# Altium PCB WeatherChannel.PcbDoc (part 2 of 2)
Units mil, origin at the board's own origin, x right, y up, seen from the top; angles counter-clockwise.
Board outline 4050 x 7300 mil, 2 copper layers (Top Layer, Bottom Layer); 129 components, 144 nets, 770 pads, 170 vias.
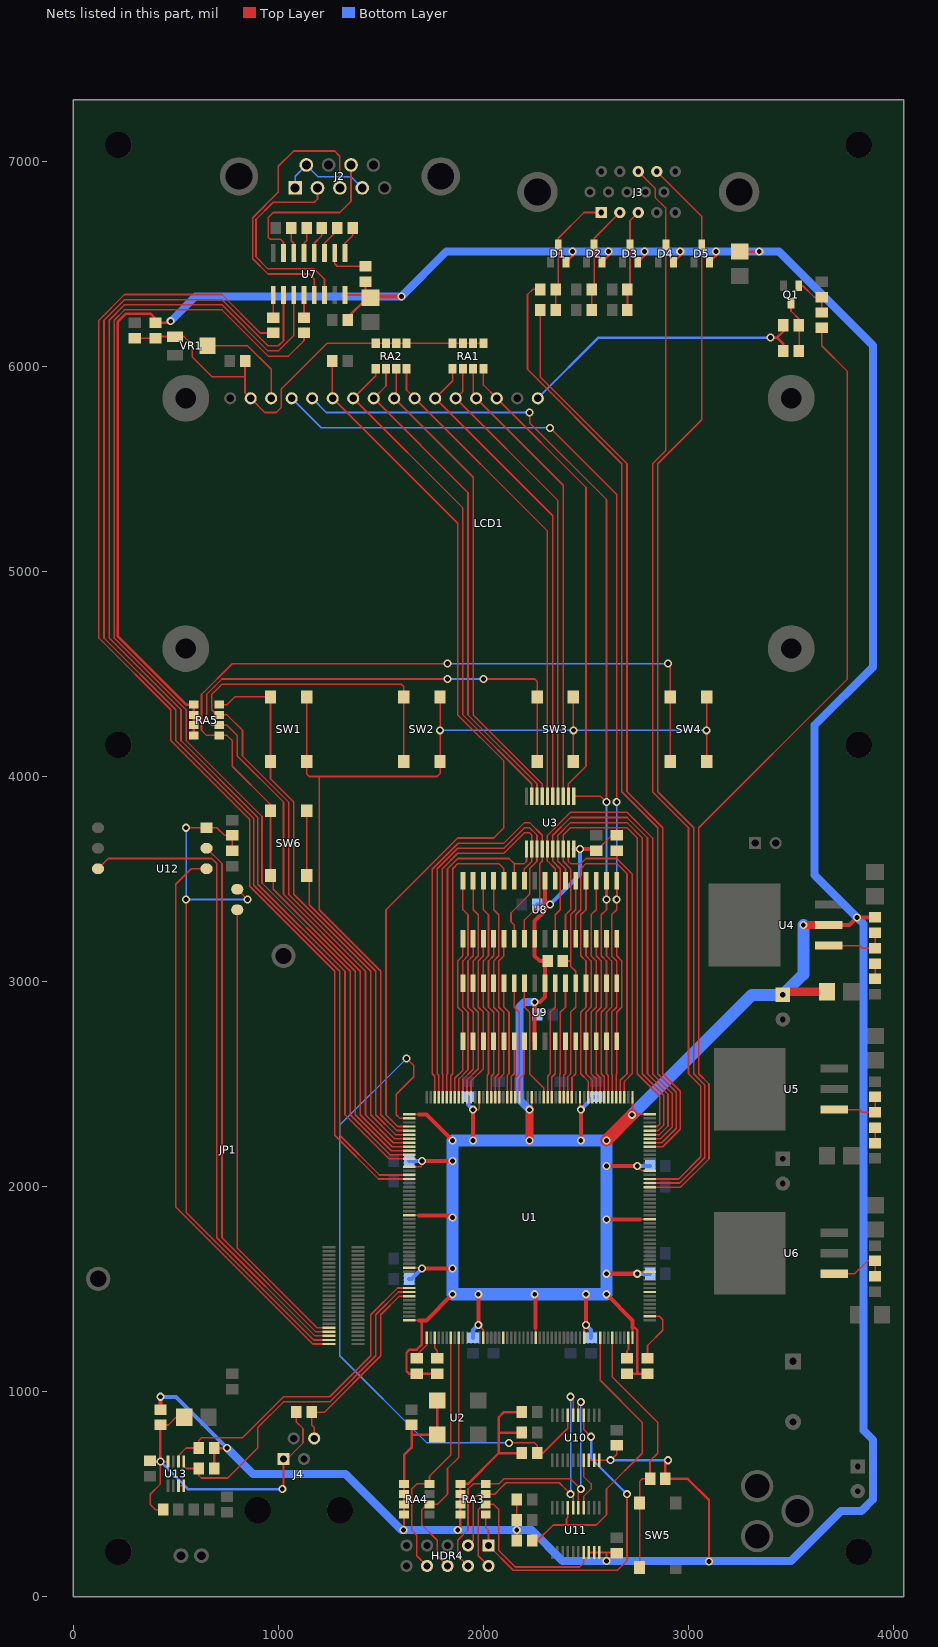
[diagram p2: the nets of this part, all layers, seen from the top]

## Via types
v1: diameter 39.37, hole 23.62, Top Layer to Bottom Layer, 170 vias

## Nets (pads, with @x,y where several pads share a name; then routed paths per layer and width w, separated by ;. In a path a pad name is that pad's centre, name@x,y a point inside that pad or via, vN(x,y) a via of type N, cw(c..) or ccw(c..) an arc to the next point about the centre after c; other vN are vias at no path point) (continued)
JTAG_NEXUS_TDO: HDR4.6 RA4.2 U1.165 | length 1294.2
  Top Layer w7.87: HDR4.6@1825,175 HDR4.6@1825,150 1775,200 1775,275 1700,350 1700,425 1725,450 RA4.2@1737,450 1775,450 1825,500 1825,625 1880.51,680.51 U1.165@1880.51,1263.39
JTAG_NEXUS_TMS: HDR4.8 RA4.4 U1.163 | length 1259.9
  Top Layer w7.87: HDR4.8@1725,150 1675,200 1675,300 1650,325 1650,525 1675,550 RA4.4@1737,550 1737,587 1841.14,691.14 U1.163@1841.14,1263.39
KP_COL0: RA5.4 SW1.3 SW1.4 U1.111 | length 2742.1
  Top Layer w7.87: RA5.4@712,4350 750,4350 787.87,4387.87 SW1.3@961.81,4387.87 SW1.4@961.81,4072.52 961.81,3988.19 1075,3875 1075,3425 1450,3050 1450,2375 1450,2350 1566.14,2233.86 U1.111@1638.39,2233.86
KP_COL1: RA5.3 SW2.3 SW2.4 U1.112 | length 3987.7
  Top Layer w7.87: SW2.4@1611.81,4072.52 SW2.3@1611.81,4387.87 1611.81,4438.19 1600,4450 725,4450 675,4400 675,4325 700,4300 RA5.3@712,4300 750,4300 825,4225 825,4100 1050,3875 1050,3425 1425,3050 1425,2375 1425,2350 1560.83,2214.17 U1.112@1638.39,2214.17
KP_COL2: RA5.2 SW3.3 SW3.4 U1.113 | length 4745.8
  Top Layer w7.87: U1.113@1638.39,2194.49 1555.51,2194.49 1400,2350 1400,2375 1400,3050 1025,3425 1025,3875 800,4100 800,4200 750,4250 RA5.2@712,4250 675,4250 650,4275 650,4400 725,4475 v1(1825,4475) ; v1(2000,4475) 2250,4475 2261.81,4463.19 SW3.3@2261.81,4387.87 SW3.4@2261.81,4072.52
  Bottom Layer w7.87: v1(1825,4475) v1(2000,4475)
KP_COL3: RA5.1 SW4.3 SW4.4 SW6.3 SW6.4 U1.114 | length 5574.7
  Top Layer w7.87: SW6.4@961.81,3517.52 975,3504.33 975,3450 1375,3050 1375,2375 1375,2350 1550.2,2174.8 U1.114@1638.39,2174.8 ; SW6.4@961.81,3522.52 SW6.3@961.81,3837.87 ; SW6.3@961.81,3832.87 961.81,3863.19 775,4050 775,4175 750,4200 RA5.1@712,4200 650,4200 625,4225 625,4400 775,4550 v1(1825,4550) ; v1(2900,4550) 2911.81,4538.19 SW4.3@2911.81,4387.87 SW4.4@2911.81,4072.52
  Bottom Layer w7.87: v1(1825,4550) v1(2900,4550)
KP_ROW0: SW1.1 SW1.2 SW2.1 SW2.2 SW3.1 SW3.2 SW4.1 SW4.2 U1.109 | length 5286.3
  Top Layer w7.87: SW1.1@1138.58,4387.87 SW1.2@1138.58,4072.52 1138.58,4011.42 1150,4000 1775,4000 1788.58,4013.58 SW2.2@1788.58,4072.52 SW2.1@1788.58,4387.87 ; 1200,4000 1200,3350 1500,3050 1500,2375 1500,2350 1576.77,2273.23 U1.109@1638.39,2273.23 ; SW3.2@2438.58,4072.52 SW3.1@2438.58,4387.87 ; SW4.2@3088.58,4072.52 SW4.1@3088.58,4387.87
  Bottom Layer w7.87: v1(1788.58,4225) v1(2438.58,4225) v1(3088.58,4225)
KP_ROW1: U1.8
KP_ROW2: U1.176
KP_ROW3: SW6.1 SW6.2 U1.110 | length 1825.6
  Top Layer w7.87: SW6.2@1138.58,3517.52 1150,3506.1 1150,3375 1475,3050 1475,2375 1475,2350 1571.46,2253.54 U1.110@1638.39,2253.54 ; SW6.2@1138.58,3522.52 SW6.1@1138.58,3837.87
LCD_BCKL: R9.1 U1.34 | length 4770.7
  Top Layer w7.87: U1.34@2811.61,1997.64 2962.64,1997.64 3100,2135 3100,2500 3050,2550 3050,3750 3775,4475 3775,5975 3650,6100 R9.1@3650,6187.6
LCD_D0: LCD1.7 RA2.1 U3.9 | length 2490.2
  Top Layer w7.87: RA2.1@1475,5988 1475,5954 LCD1.7@1365,5844 1900,5309 1900,4300 2235.43,3964.57 U3.9@2235.43,3903.94
LCD_D1: LCD1.8 RA2.2 U3.8 | length 2438.6
  Top Layer w7.87: RA2.2@1525,5988 1525,5904 LCD1.8@1465,5844 1925,5384 1925,4300 2261.02,3963.98 U3.8@2261.02,3903.94
LCD_D2: LCD1.9 RA2.3 U3.7 | length 2387.3
  Top Layer w7.87: LCD1.9@1550,5850 1575,5875 RA2.3@1575,5988 ; LCD1.9@1565,5844 1950,5459 1950,4300 2286.61,3963.39 U3.7@2286.61,3903.94
LCD_D3: LCD1.10 RA2.4 U3.6 | length 2368.7
  Top Layer w7.87: RA2.4@1625,5988 1625,5884 LCD1.10@1665,5844 2312.2,5196.8 U3.6@2312.2,3903.94
LCD_D4: LCD1.11 RA1.1 U3.5 | length 2356.5
  Top Layer w7.87: RA1.1@1850,5988 1850,5929 LCD1.11@1765,5844 2337.8,5271.2 U3.5@2337.8,3903.94
LCD_D5: LCD1.12 RA1.2 U3.4 | length 2305
  Top Layer w7.87: RA1.2@1900,5988 1900,5879 LCD1.12@1865,5844 2363.39,5345.61 U3.4@2363.39,3903.94
LCD_D6: LCD1.13 RA1.3 U3.3 | length 2265.9
  Top Layer w7.87: RA1.3@1950,5988 1950,5859 LCD1.13@1965,5844 2388.98,5420.02 U3.3@2388.98,3903.94
LCD_D7: LCD1.14 RA1.4 U3.2 | length 2326.6
  Top Layer w7.87: RA1.4@2000,5988 2000,5909 LCD1.14@2065,5844 2500,5409 2500,4050 2414.57,3964.57 U3.2@2414.57,3903.94
LCD_E: LCD1.6 R5.1 U1.108 | length 4496.2
  Top Layer w7.87: LCD1.6@1262.6,5846.4 R5.1@1262.6,6025 ; LCD1.6@1265,5844 1875,5234 1875,4300 2100,4075 2100,3750 2050,3700 1875,3700 1725,3550 1525,3350 1525,2350 1582.09,2292.91 U1.108@1638.39,2292.91
LCD_EDATA: R6.1 U1.55 U3.19 | length 1558.3
  Top Layer w7.87: U3.19@2414.57,3646.06 2414.57,3585.43 2425,3575 2475,3575 2500,3600 2650,3600 ; R6.1@2650,3637.6 2650,3600 ; U1.55@2687.6,2436.61 2687.6,2512.6 2725,2550 2725,3525 2650,3600
NetC14_1: C14.1 U7.1 | length 138.1
  Top Layer w7.87: U7.1@1325,6552.36 1325,6600 1362.4,6637.4 C14.1@1362.4,6675
NetC14_2: C14.2 U7.3 | length 148.6
  Top Layer w7.87: U7.3@1225,6552.36 1225,6600 1287.6,6662.6 C14.2@1287.6,6675
NetC15_2: C15.2 U7.2 | length 207.6
  Top Layer w7.87: U7.2@1275,6552.36 1275,6500 1287.6,6487.4 C15.2@1425,6487.4
NetC16_1: C16.1 U7.4 | length 138.1
  Top Layer w7.87: U7.4@1175,6552.36 1175,6600 1212.4,6637.4 C16.1@1212.4,6675
NetC16_2: C16.2 U7.5 | length 127.9
  Top Layer w7.87: U7.5@1125,6552.36 1125,6600 1137.6,6612.6 C16.2@1137.6,6675
NetC17_1: C17.1 U7.6 | length 127.9
  Top Layer w7.87: C17.1@1062.4,6675 1062.4,6612.6 1075,6600 U7.6@1075,6552.36
NetC41_1: C41.1 C42.1 JP1.2 U12.1 U12.7 | length 3516.3
  Top Layer w7.87: v1(550,3400) 550,1875 1173.03,1251.97 JP1.2@1246.46,1251.97 ; v1(550,3750) U12.1@650,3750 700,3750 737.4,3712.6 C42.1@775,3712.6 C41.1@775,3637.4 ; U12.7@799.61,3450 849.61,3400 v1(850,3400)
  Bottom Layer w7.87: v1(550,3750) v1(550,3400) v1(850,3400)
NetD1_3: D1.3 J3.1 R31.2 R34.2 | length 617
  Top Layer w7.87: R31.2@2352.4,6275 R34.2@2352.4,6375 2365,6387.6 D1.3@2365,6593.31 2365,6625 2490,6750 J3.1@2575,6750
NetD2_3: D2.3 J3.2 R32.2 R35.2 | length 532.1
  Top Layer w7.87: R32.2@2527.4,6275 R35.2@2527.4,6375 2540,6387.6 D2.3@2540,6593.31 2540,6624.84 J3.2@2665.16,6750
NetD3_3: D3.3 J3.3 R33.2 R36.2 | length 496.9
  Top Layer w7.87: R33.2@2702.4,6275 R36.2@2702.4,6375 2715,6387.6 D3.3@2715,6593.31 2715,6709.68 J3.3@2755.32,6750
NetJ2_1: J2.1 J2.4 J2.6 | length 457.5
  Bottom Layer w7.87: J2.1@1081.89,6870.08 1081.89,6927.36 J2.6@1136.42,6981.89 1193.31,6925 1354.13,6925 J2.4@1409.05,6870.08 ; J2.1@1104.92,6845.08 J2.1@1109.05,6845.08
NetJP1_1: JP1.1 U12.3 | length 2779.1
  Top Layer w7.87: U12.3@650,3550 575,3550 500,3475 500,1900 1167.72,1232.28 JP1.1@1246.46,1232.28
NetJP1_3: JP1.3 U12.6 | length 3180.2
  Top Layer w7.87: U12.6@120.47,3550 170.47,3600 675,3600 700,3575 700,1750 1178.35,1271.65 JP1.3@1246.46,1271.65
NetJP1_4: JP1.4 U12.2 | length 2642.5
  Top Layer w7.87: U12.2@650,3650 725,3575 725,1750 1183.66,1291.34 JP1.4@1246.46,1291.34
NetJP1_5: JP1.5 U12.8 | length 2257.7
  Top Layer w7.87: U12.8@799.61,3350 799.61,1700.39 1188.98,1311.02 JP1.5@1246.46,1311.02
NetLCD1_3: LCD1.3 VR1.W | length 499.9
  Top Layer w7.87: VR1.W@653.74,6100 850,6100 965,5985 LCD1.3@965,5844
NetLCD1_16: LCD1.16 R7.1 R8.1 | length 1454
  Top Layer w11.81: v1@3410,6150 v1(3400,6140) 3431.5,6140 ; R8.1@3462.6,6075 3462.6,6108.9 3431.5,6140 ; R7.1@3462.6,6200 3462.6,6171.1 3431.5,6140
  Bottom Layer w11.81: LCD1.16@2265,5844 2561,6140 v1(3400,6140)
NetQ1_1: Q1.1 R9.2 R10.2 | length 210.9
  Top Layer w7.87: Q1.1@3537.4,6393.31 3556.69,6393.31 3612.4,6337.6 R10.2@3650,6337.6 R9.2@3650,6262.4
NetQ1_3: Q1.3 R7.2 R8.2 | length 248.3
  Top Layer w7.87: Q1.3@3500,6306.69 3500,6269.29 3540,6229.29 3540,6197.4 R8.2@3540,6075
NetR13_2: R13.2 R16.1 U4.1 | length 305.4
  Top Layer w7.87: U4.1@3685,3175 3835,3175 3847.6,3162.4 R16.1@3910,3162.4 R13.2@3910,3237.6
NetR14_2: R14.2 R18.1 U5.1 | length 280.4
  Top Layer w7.87: U5.1@3710,2375 3835,2375 3847.6,2362.4 R18.1@3910,2362.4 R14.2@3910,2437.6
NetR15_2: R15.2 R20.1 U6.1 | length 301.1
  Top Layer w7.87: U6.1@3710,1575 3810,1575 3872.6,1637.6 R15.2@3910,1637.6 R20.1@3910,1562.4
NetR16_2: R16.2 R17.1 | length 75.2
  Top Layer w7.87: R17.1@3910,3012.4 R16.2@3910,3087.6
NetR18_2: R18.2 R19.1 | length 75.2
  Top Layer w7.87: R19.1@3910,2212.4 R18.2@3910,2287.6
NetR21_2: R21.2 U7.12 | length 110.2
  Top Layer w7.87: R21.2@1125,6237.4 U7.12@1125,6347.64
NetR22_2: R22.2 U7.9 | length 110.2
  Top Layer w7.87: R22.2@975,6237.4 U7.9@975,6347.64
NetU10_17: U10.17 U11.4 | length 261.8
  Top Layer w7.87: U11.4@2488.39,434.25 2488.39,488.39 2525,525 2525,550 2488.39,586.61 U10.17@2488.39,665.75
NetU13_3: U13.3 U13.4 | length 25.6
  Top Layer w7.87: U13.3@512.8,540.95 U13.4@538.39,540.95
PROGRAM: R26.2 U1.106 U10.7 | length 3423.5
  Top Layer w7.87: v1(1625,2625) 1660,2590 1660,2535 1575,2450 1575,2350 1592.72,2332.28 U1.106@1638.39,2332.28 ; v1(2125,750) 2250,750 2262.4,737.6 R26.2@2262.4,700 2290,700 2411.61,821.61 U10.7@2411.61,884.25
  Bottom Layer w7.87: v1(1625,2625) 1300,2300 1300,1175 1725,750 v1(2125,750)
PROGRAM_PR: R29.2 U1.200 U11.7 | length 1522.4
  Top Layer w7.87: R29.2@2237.4,275 2265,275 2340,350 2385,350 2550,350 2600,400 2600,525 2775,700 2775,850 2569.49,1055.51 U1.200@2569.49,1263.39 ; 2405,350 2405,380 2411.61,386.61 U11.7@2411.61,434.25
RAM0_DATA0: U1.99 U3.11 U8.11 | length 1679.3
  Top Layer w7.87: U1.99@1821.46,2436.61 1821.46,2546.46 1825,2550 1825,3550 1875,3600 2125,3600 2150,3575 ; U8.11@2150,3491.73 2150,3575 ; U3.11@2209.84,3646.06 2209.84,3584.84 2200,3575 2150,3575
RAM0_DATA1: U1.100 U3.12 U8.10 | length 1863.9
  Top Layer w7.87: U1.100@1801.77,2436.61 1801.77,2548.23 1800,2550 1800,3550 1875,3625 2100,3625 2200,3725 2225,3725 2235.43,3714.57 2235.43,3585.43 2200,3550 U8.10@2200,3491.73
RAM0_DATA2: U1.101 U3.13 U8.22 | length 2264.9
  Top Layer w7.87: U1.101@1782.09,2436.61 1782.09,2542.91 1775,2550 1775,3550 1875,3650 2100,3650 2200,3750 2225,3750 2261.02,3713.98 2261.02,3586.02 2225,3550 2225,3425 2134.25,3334.25 2134.25,3290.93 2150,3275.18 U8.22@2150,3208.27
RAM0_DATA3: U1.102 U3.14 U8.23 | length 2314.9
  Top Layer w7.87: U1.102@1762.4,2436.61 1762.4,2537.6 1750,2550 1750,3547.27 1875,3672.27 1875,3675 2100,3675 2200,3775 2225,3775 2286.61,3713.39 2286.61,3586.61 2275,3575 2275,3375 2200,3300 U8.23@2200,3208.27
RAM0_DATA4: U1.46 U3.15 U8.7 | length 2428.4
  Top Layer w7.87: U8.7@2350,3491.73 2350,3550 2312.2,3587.8 2312.2,3712.2 2425,3825 2700,3825 2825,3700 2825,2550 2920,2455 2920,2290 2863.86,2233.86 U1.46@2811.61,2233.86
RAM0_DATA5: U1.47 U3.16 U8.26 | length 2622
  Top Layer w7.87: U8.26@2350,3208.27 2350,3325 2375,3350 2375,3550 2337.8,3587.2 2337.8,3712.8 2425,3800 2700,3800 2800,3700 2800,2550 2900,2450 2900,2295 2858.54,2253.54 U1.47@2811.61,2253.54
RAM0_DATA6: U1.48 U3.17 U8.6 | length 2228
  Top Layer w7.87: U8.6@2400,3491.73 2400,3550 2363.39,3586.61 2363.39,3713.39 2425,3775 2700,3775 2775,3700 2775,2550 2880,2445 2880,2300 2853.23,2273.23 U1.48@2811.61,2273.23
RAM0_DATA7: U1.49 U3.18 U8.27 | length 2421.6
  Top Layer w7.87: U8.27@2400,3208.27 2400,3325 2425,3350 2425,3550 2388.98,3586.02 2388.98,3713.98 2425,3750 2700,3750 2750,3700 2750,2550 2860,2440 2860,2305 2847.91,2292.91 U1.49@2811.61,2292.91
RAM0_OE: U1.56 U8.28 | length 1709.8
  Top Layer w7.87: U8.28@2450,3208.27 2450,3325 2475,3350 2475,3550 2500,3575 2650,3575 2700,3525 2700,2550 2667.91,2517.91 U1.56@2667.91,2436.61
RAM0_WE: U1.98 U8.12 | length 1446
  Top Layer w7.87: U1.98@1841.14,2436.61 1841.14,2541.14 1850,2550 1850,3550 1875,3575 2075,3575 2100,3550 U8.12@2100,3491.73
RAM1_DATA0: U1.71 U9.6 | length 566.5
  Top Layer w7.87: U1.71@2372.64,2436.61 2372.64,2547.64 2375,2550 2375,2850 2400,2875 U9.6@2400,2991.73
RAM1_DATA1: U1.74 U9.7 | length 570.2
  Top Layer w7.87: U1.74@2313.58,2436.61 2313.58,2538.58 2325,2550 2325,2850 2350,2875 U9.7@2350,2991.73
RAM1_DATA2: U1.75 U9.10 | length 594
  Top Layer w7.87: U9.10@2200,2991.73 2200,2875 2225,2850 2225,2550 2293.9,2481.1 U1.75@2293.9,2436.61
RAM1_DATA3: U1.82 U9.11 | length 573.3
  Top Layer w7.87: U9.11@2150,2991.73 2150,2875 2175,2850 2175,2550 2156.1,2531.1 U1.82@2156.1,2436.61
RAM1_DATA4: U1.83 U9.22 | length 277.3
  Top Layer w7.87: U1.83@2136.42,2436.61 2136.42,2536.42 2150,2550 U9.22@2150,2708.27
RAM1_DATA5: U1.81 U9.23 | length 281.7
  Top Layer w7.87: U1.81@2175.79,2436.61 2175.79,2525.79 2200,2550 U9.23@2200,2708.27
RAM1_DATA6: U1.73 U9.26 | length 278.6
  Top Layer w7.87: U1.73@2333.27,2436.61 2333.27,2533.27 2350,2550 U9.26@2350,2708.27
RAM1_DATA7: U1.70 U9.27 | length 274.8
  Top Layer w7.87: U1.70@2392.32,2436.61 2392.32,2542.32 2400,2550 U9.27@2400,2708.27
RAM1_OE: U1.68 U9.28 | length 279.2
  Top Layer w7.87: U1.68@2431.69,2436.61 2431.69,2531.69 2450,2550 U9.28@2450,2708.27
RAM1_WE: U1.84 U9.12 | length 568.9
  Top Layer w7.87: U9.12@2100,2991.73 2100,2875 2125,2850 2125,2550 2116.73,2541.73 U1.84@2116.73,2436.61
RAM_ADDR0: LCD1.4 U1.58 U8.1 U9.1 | length 4841.9
  Top Layer w7.87: v1(2325,5700) 2650,5375 v1(2650,3875) ; U1.58@2628.54,2436.61 2628.54,2546.46 2625,2550 2625,2850 2650,2875 2650,3100 2625,3125 2625,3325 2650,3350 U8.1@2650,3491.73
  Bottom Layer w7.87: LCD1.4@1065,5844 1209,5700 v1(2325,5700) ; v1(2650,3400) v1(2650,3875)
RAM_ADDR1: LCD1.5 U1.60 U3.1 U8.2 U9.2 | length 4882.8
  Top Layer w7.87: v1(2225,5775) 2225,5725 2600,5350 v1(2600,3875) 2571.06,3903.94 U3.1@2440.16,3903.94 ; U1.60@2589.17,2436.61 2589.17,2535.83 2575,2550 2575,2850 2600,2875 2600,3100 2575,3125 2575,3325 2600,3350 U8.2@2600,3491.73
  Bottom Layer w7.87: LCD1.5@1165,5844 1234,5775 v1(2225,5775) ; v1(2600,3400) v1(2600,3875)
RAM_ADDR2: U1.62 U8.3 U9.3 | length 1096.5
  Top Layer w7.87: U1.62@2549.8,2436.61 2549.8,2525.2 2525,2550 2525,2850 2550,2875 2550,3100 2525,3125 2525,3325 2550,3350 U8.3@2550,3491.73
RAM_ADDR3: U1.64 U8.4 U9.4 | length 1100.9
  Top Layer w7.87: U8.4@2500,3491.73 2500,3350 2475,3325 2475,3125 2500,3100 2500,2875 2475,2850 2475,2550 2510.43,2514.57 U1.64@2510.43,2436.61
RAM_ADDR4: U1.87 U8.13 U9.13 | length 1093.4
  Top Layer w7.87: U8.13@2050,3491.73 2050,3350 2075,3325 2075,3125 2050,3100 2050,2875 2075,2850 2075,2550 2057.68,2532.68 U1.87@2057.68,2436.61
RAM_ADDR5: U1.89 U8.14 U9.14 | length 1089
  Top Layer w7.87: U8.14@2000,3491.73 2000,3350 2025,3325 2025,3125 2000,3100 2000,2875 2025,2850 2025,2550 2018.31,2543.31 U1.89@2018.31,2436.61
RAM_ADDR6: U1.94 U8.15 U9.15 | length 1109
  Top Layer w7.87: U1.94@1919.88,2436.61 1919.88,2519.88 1975,2575 1975,2850 1950,2875 1950,3100 1975,3125 1975,3325 1950,3350 U8.15@1950,3491.73
RAM_ADDR7: U1.96 U8.16 U9.16 | length 1112.9
  Top Layer w7.87: U1.96@1880.51,2436.61 1880.51,2525.05 1925,2569.54 1925,2850 1900,2875 1900,3100 1925,3125 1925,3325 1900,3350 U8.16@1900,3500
RAM_ADDR8: U1.97 U8.17 U9.17 | length 808.6
  Top Layer w7.87: U1.97@1860.83,2436.61 1860.83,2527.64 1900,2566.81 1900,2850 1875,2875 1875,3100 1900,3125 U8.17@1900,3208.27
RAM_ADDR9: U1.95 U8.18 U9.18 | length 813
  Top Layer w7.87: U1.95@1900.2,2436.61 1900.2,2522.47 1950,2572.27 1950,2850 1925,2875 1925,3100 1950,3125 U8.18@1950,3208.27
RAM_ADDR10: U1.93 U8.19 U9.19 | length 817.4
  Top Layer w7.87: U1.93@1939.57,2436.61 1939.57,2514.57 2000,2575 2000,2850 1975,2875 1975,3100 2000,3125 U8.19@2000,3208.27
RAM_ADDR11: U1.88 U8.20 U9.20 | length 797.3
  Top Layer w7.87: U1.88@2037.99,2436.61 2037.99,2537.99 2050,2550 2050,2850 2025,2875 2025,3100 2050,3125 U8.20@2050,3208.27
RAM_ADDR12: U1.86 U8.21 U9.21 | length 801.7
  Top Layer w7.87: U1.86@2077.36,2436.61 2077.36,2527.36 2100,2550 2100,2850 2075,2875 2075,3100 2100,3125 U8.21@2100,3208.27
RAM_ADDR13: U1.63 U8.29 U9.29 | length 804.8
  Top Layer w7.87: U8.29@2500,3208.27 2500,3125 2525,3100 2525,2875 2500,2850 2500,2550 2530.12,2519.88 U1.63@2530.12,2436.61
RAM_ADDR14: U1.61 U8.30 U9.30 | length 800.4
  Top Layer w7.87: U8.30@2550,3208.27 2550,3125 2575,3100 2575,2875 2550,2850 2550,2550 2569.49,2530.51 U1.61@2569.49,2436.61
RAM_ADDR15: U1.59 U8.31 U9.31 | length 796
  Top Layer w7.87: U8.31@2600,3208.27 2600,3125 2625,3100 2625,2875 2600,2850 2600,2550 2608.86,2541.14 U1.59@2608.86,2436.61
RAM_ADDR16: U1.57 U8.32 U9.32 | length 793.1
  Top Layer w7.87: U1.57@2648.23,2436.61 2648.23,2548.23 2650,2550 2650,2850 2675,2875 2675,3100 2650,3125 U8.32@2650,3208.27
RAM_CS: R23.2 U1.69 U8.5 U9.5 | length 1129.2
  Top Layer w7.87: R23.2@2387.4,3100 2425,3100 ; U1.69@2412.01,2436.61 2412.01,2537.01 2425,2550 2425,2850 2450,2875 2450,3050 2425,3075 2425,3325 2450,3350 U8.5@2450,3491.73
RED0: R31.1 U1.44 | length 4461.5
  Top Layer w7.87: R31.1@2277.6,6275 2277.6,5947.4 2700,5525 2700,5125 2700,3925 2875,3750 2875,2550 2960,2465 2960,2280 2874.49,2194.49 U1.44@2811.61,2194.49
RED1: R34.1 U1.45 | length 4596
  Top Layer w7.87: R34.1@2277.6,6375 2240,6375 2215,6350 2215,5985 2675,5525 2675,5125 2675,3925 2850,3750 2850,2550 2940,2460 2940,2285 2869.17,2214.17 U1.45@2811.61,2214.17
RS_CTS: R22.1 U1.121 | length 5882.4
  Top Layer w7.87: R22.1@975,6162.6 912.4,6162.6 725,6350 250,6350 125,6225 125,4675 475,4325 475,4175 860,3790 860,3465 1275,3050 1275,2300 1275,2250 1487.99,2037.01 U1.121@1638.39,2037.01
RS_RTS: U1.120 U7.10 | length 6112.4
  Top Layer w7.87: U7.10@1025,6347.64 1025,6125 1000,6100 950,6100 725,6325 250,6325 150,6225 150,4675 500,4325 500,4175 880,3795 880,3470 1300,3050 1300,2375 1300,2300 1300,2250 1493.31,2056.69 U1.120@1638.39,2056.69
RS_RX: R21.1 U1.115 | length 5828
  Top Layer w7.87: R21.1@1125,6162.6 1125,6125 1050,6050 950,6050 725,6275 250,6275 200,6225 200,4675 550,4325 550,4175 920,3805 920,3480 1350,3050 1350,2375 1350,2350 1544.88,2155.12 U1.115@1638.39,2155.12
RS_TX: U1.116 U7.11 | length 6006.6
  Top Layer w7.87: U7.11@1075,6347.64 1075,6150 1000,6075 950,6075 725,6300 250,6300 175,6225 175,4675 525,4325 525,4175 900,3800 900,3475 1325,3050 1325,2375 1325,2350 1539.57,2135.43 U1.116@1638.39,2135.43
RTS: J2.8 U7.7 | length 847.8
  Top Layer w7.87: U7.7@1025,6552.36 1025,6605 1010,6620 960,6620 950,6630 950,6725 975,6750 1300,6750 1354.53,6804.53 J2.8@1354.53,6981.89
RX: J2.3 U7.13 | length 1416.9
  Top Layer w7.87: U7.13@1175,6347.64 1175,6425 1150,6450 950,6450 875,6525 875,6725 1000,6850 1000,6975 1075,7050 1275,7050 1300,7025 J2.3@1300,6870.08
SCL: R37.2 U1.149 U13.5 | length 1717.8
  Top Layer w7.87: U13.5@538.39,659.06 538.39,636.61 550,625 R37.2@612.6,625 612.6,591.06 625,578.66 723.66,578.66 753.66,578.66 900,725 900,825 1025,950 1250,950 1475,1175 1475,1375 1585.83,1485.83 U1.149@1638.39,1485.83
SDA: R38.2 U1.148 U13.6 | length 1632.2
  Top Layer w7.87: U13.6@512.8,659.06 512.8,687.8 550,725 R38.2@612.6,725 612.6,762.6 625,775 825,775 900,850 1025,975 1250,975 1450,1175 1450,1375 1580.51,1505.51 U1.148@1638.39,1505.51
SPEED: J4.4 R40.2 U1.150 | length 960.8
  Top Layer w7.87: J4.4@1175,772.05 1175,825 1162.4,837.6 R40.2@1162.4,900 1225,900 1500,1175 1500,1375 1591.14,1466.14 U1.150@1638.39,1466.14
TCK: R3.2 U1.207 | length 104
  Top Layer w7.87: R3.2@2700,1162.4 2700,1200 2707.28,1207.28 U1.207@2707.28,1263.39
TCK_HARD: HDR4.3 RA3.3 U10.6 U11.6 | length 1408.5
  Top Layer w7.87: HDR4.3@1925,250 1950,275 1950,475 1975,500 RA3.3@2012,500 2055,500 2080,525 2110.75,555.75 2369.25,555.75 2400,525 v1(2425,500) 2437.2,487.8 U11.6@2437.2,434.25 ; v1(2425,975) 2437.2,962.8 U10.6@2437.2,884.25
  Bottom Layer w7.87: v1(2425,500) v1(2425,975)
TDI: R2.2 U1.159 | length 106.2
  Top Layer w7.87: U1.159@1762.4,1263.39 1762.4,1212.6 1775,1200 R2.2@1775,1162.4
TDI_HARD: HDR4.1 RA3.1 U10.4 | length 1696.3
  Top Layer w7.87: RA3.1@2012,400 2012,338 2025,325 HDR4.1@2025,250 2145.75,129.25 2589.25,129.25 2654.25,129.25 2700,175 2700,240 v1(2700,500) ; U10.4@2488.39,884.25 2488.39,816.61 v1(2525,780)
  Bottom Layer w11.81: v1(2525,780) 2525,675 v1(2700,500)
TDO: R1.2 U1.157 | length 120.9
  Top Layer w7.87: R1.2@1675,1162.4 1675,1178.94 1723.03,1226.97 U1.157@1723.03,1263.39
TDO_HARD: HDR4.2 RA3.2 U11.17 | length 1122.9
  Top Layer w7.87: HDR4.2@2025,150 1975,200 1975,425 2000,450 RA3.2@2012,450 2050,450 2075,425 2075,225 2155,145 2470,145 2488.39,163.39 U11.17@2488.39,215.75
TEST: R30.2 SW5.1 SW5.2 U1.203 | length 1271.7
  Top Layer w7.87: U1.203@2628.54,1263.39 2628.54,1071.46 2850,850 2850,699.8 2812.6,662.4 R30.2@2812.6,575 2775,575 2761.42,561.42 SW5.2@2761.42,457.48 SW5.1@2761.42,142.13
TMS: R4.2 U1.2 | length 289.4
  Top Layer w7.87: R4.2@2800,1162.4 2800,1225 2875,1300 2875,1350 2857.28,1367.72 U1.2@2811.61,1367.72
TMS_HARD: HDR4.4 RA3.4 U10.5 U11.5 | length 1599.4
  Top Layer w7.87: HDR4.4@1925,150 1875,200 1875,275 1925,325 1925,525 1950,550 RA3.4@2012,550 2075,550 2100,575 2425,575 2450,550 v1(2475,525) 2462.8,512.8 U11.5@2462.8,434.25 ; U10.5@2462.8,884.25 2462.8,937.8 v1(2475,950)
  Bottom Layer w7.87: v1(2475,525) v1(2475,950)
TX: J2.2 U7.14 | length 1031.7
  Top Layer w7.87: J2.2@1190.94,6870.08 1190.94,6815.94 1175,6800 975,6800 890.94,6715.94 890.94,6534.06 950,6475 1175,6475 1225,6425 U7.14@1225,6350
VCC: C1.1 C3.1 C4.1 C8.1 C15.1 C18.1 C19.1 C20.1 C21.1 C22.2 C23.2 C24.1 C25.1 C26.1 C27.1 C28.1 C29.1 C30.1 C31.1 C40.1 D1.2 D2.2 D3.2 D4.2 D5.2 R1.1 R2.1 R3.1 R4.1 R6.2 R12.1 R13.1 R23.1 R24.1 R25.1 R26.1 R27.1 R28.1 R29.1 R30.1 R37.1 R38.1 R42.1 RA3.5 RA3.6 RA3.7 RA3.8 RA4.5 RA4.6 RA4.7 RA4.8 RA5.5 RA5.6 RA5.7 RA5.8 U1.13 U1.26 U1.38 U1.52 U1.53 U1.66 U1.78 U1.91 U1.105 U1.118 U1.130 U1.143 U1.156 U1.171 U1.184 U1.196 U1.208 U2.1 U2.4 U3.20 U4.2 U7.16 U8.8 U8.24 U9.8 U9.24 U10.18 U10.19 U10.20 U11.18 U11.19 U11.20 | length 32857.5
  Top Layer w7.87: v1(1610.23,325) 1613,327.77 RA4.8@1613,400 RA4.5@1613,550 ; U1.156@1638.39,1348.03 1686.61,1348.03 ; U1.143@1638.39,1603.94 1696.06,1603.94 v1(1700,1600) ; U1.130@1638.39,1859.84 1686.61,1859.84 ; U1.118@1638.39,2096.06 1696.06,2096.06 1700,2100 v1(1700,2125) ; U1.105@1638.39,2351.97 1686.61,2351.97 ; v1(1950,2375) 1975,2375 1978.94,2378.94 U1.91@1978.94,2436.61 ; v1(1975,1325) 1998.62,1301.38 U1.171@1998.62,1263.39 ; R29.1@2162.6,275 R28.1@2162.6,475 ; v1(2225,2375) 2234.84,2384.84 U1.78@2234.84,2436.61 ; U1.184@2254.53,1263.39 2254.53,1311.61 ; U1.66@2471.06,2436.61 2471.06,2378.94 v1(2475,2375) ; U1.196@2490.75,1263.39 2490.75,1315.75 v1(2500,1325) ; U11.18@2513.98,215.75 U11.20@2565.16,215.75 2646.85,215.75 C22.2@2650,212.6 ; U10.18@2513.98,665.75 U10.20@2565.16,665.75 v1(2620.48,665.75) 2650,695.27 C23.2@2650,737.6 ; C3.1@2550,3637.6 2624.8,3712.4 R6.2@2650,3712.4 ; v1(2600,175) 2600,215.75 ; v1(2725,2350) v1@2726.97,2351.97 ; U1.208@2726.97,1263.39 2726.97,1311.61 ; U1.53@2726.97,2436.61 v1@2726.97,2351.97 ; v1(2750,1575) 2759.25,1584.25 U1.13@2811.61,1584.25 ; v1(2750,2100) 2773.62,2076.38 U1.38@2811.61,2076.38 ; 2763.39,1840.16 U1.26@2811.61,1840.16 ; U1.52@2811.61,2351.97 v1@2726.97,2351.97
  Top Layer w11.81: v1(475,6220) 467.4,6212.4 R12.1@400,6212.4 400,6233.26 375.98,6257.28 257.34,6257.28 217.72,6217.66 217.72,4682.34 550.05,4350 RA5.5@588,4350 RA5.8@588,4200 ; R37.1@687.4,625 R38.1@687.4,725 v1(750,725) ; U7.16@1325,6347.64 1436.42,6347.64 C19.1@1450,6334.05 ; C18.1@1337.4,6225 1337.4,6237.4 1434.05,6334.05 C19.1@1450,6334.05 ; C15.1@1425,6412.6 1425,6359.05 C19.1@1450,6334.05 ; RA4.5@1613,550 1613,690.37 1650,727.37 C1.1@1650,837.6 ; 1655.72,790.75 U2.1@1775,790.75 U2.4@1775,956.1 ; 1700,1348.03 1700,1230 1675,1205 1640,1205 1625,1190 1625,1100.39 1637.79,1087.6 R1.1@1675,1087.6 R2.1@1775,1087.6 ; v1(1875,325) 1888,338 RA3.8@1888,400 RA3.5@1888,550 1924.95,550 2074.94,700 ; 2074.94,800 R24.1@2187.6,800 ; R26.1@2187.6,700 2074.94,700 ; R25.1@2187.6,900 2100,900 2074.94,874.95 2074.94,700 ; D1.2@2402.4,6506.69 2435,6539.29 v1(2435,6559.06) ; D2.2@2577.4,6506.69 2610,6539.29 v1(2610,6559.06) ; R3.1@2700,1087.6 R4.1@2800,1087.6 ; 2726.97,1311.61 2738.39,1311.61 2750,1300 2750,1087.6 ; D3.2@2752.4,6506.69 2785,6539.29 v1(2785,6559.06) ; v1(2900,665.35) 2887.4,652.75 R30.1@2887.4,575 2995.86,575 3100,470.86 v1(3100,171.65) ; D4.2@2927.4,6506.69 2960,6539.29 v1(2960,6559.06) ; D5.2@3102.4,6506.69 3135,6539.29 v1(3135,6559.05) ; C40.1@3250,6559.05 3344.05,6559.05 v1(3345,6560)
  Top Layer w19.68: R42.1@425,912.4 v1(425,975) ; C19.1@1455.95,6340 v1(1600,6340) ; 1686.61,1348.03 1723.03,1348.03 v1(1850,1475) ; 1686.61,1859.84 1840.16,1859.84 v1(1850,1850) ; 1686.61,2351.97 1723.03,2351.97 v1(1850,2225) ; v1(1700,1600) v1(1850,1600) ; v1(1700,2125) v1(1850,2125) ; v1(1950,2225) v1(1950,2375) ; v1(1975,1325) v1(1975,1475) ; v1(2250,1475) 2254.53,1470.47 2254.53,1311.61 ; U9.24@2250,2708.27 v1(2250,2900) 2275,2900 2300,2925 2300,3100 2275,3100 2250,3125 2250,3295 2300,3345 U8.8@2300,3491.73 ; 2300,3375 v1(2325,3375) ; U3.20@2440.16,3646.06 v1(2471.06,3646.06) 2541.54,3646.06 C3.1@2550,3637.6 ; v1(2475,2225) v1(2475,2375) ; v1(2500,1325) v1(2500,1475) ; v1(2600,1475) 2726.97,1348.03 2726.97,1311.61 ; v1(2600,1575) v1(2750,1575) ; v1(2600,1840) 2600.16,1840.16 2763.39,1840.16 ; v1(2600,2100) v1(2750,2100) ; U4.2@3685,3275 3785,3275 v1(3822.4,3312.4) R13.1@3910,3312.4
  Top Layer w39.37: v1(2225,2225) v1(2225,2375) ; C4.1@3460,2935 3475,2950 C8.1@3675.95,2950 ; v1(3560,3275) U4.2@3685,3275
  Top Layer w59.06: v1(2600,2225) v1(2725,2350)
  Bottom Layer w7.87: v1@2440,6560 v1@2440.95,6559.05 ; v1@2965,6559.05 v1@2965,6560
  Bottom Layer w11.81: v1(2620.48,665.75) 2899.6,665.75 v1(2900,665.35)
  Bottom Layer w19.68: v1(425,975) 500,975 v1(750,725) ; C24.1@1637.4,1550 1650,1550 v1(1700,1600) ; C31.1@1637.4,2125 v1(1700,2125) ; C27.1@1925,2437.6 1925,2400 v1(1950,2375) ; C28.1@1950,1262.4 1950,1300 v1(1975,1325) ; C20.1@2250,2837.4 v1(2250,2900) ; C21.1@2262.4,3375 v1(2325,3375) 2471.06,3521.06 v1(2471.06,3646.06) ; v1(2475,2375) 2537.6,2437.6 C25.1@2550,2437.6 ; v1(2500,1325) 2525,1300 C29.1@2525,1262.4 ; v1(2750,1575) C30.1@2812.6,1575 ; v1(2750,2100) C26.1@2812.6,2100
  Bottom Layer w39.37: v1(475,6220) 595,6340 v1(1600,6340) 1819.06,6559.06 2975.94,6559.06 3440.95,6559.05 3899.2,6100.8 ; v1(750,725) 876.98,598.02 924.02,598.02 1326.98,598.02 1600,325 v1(2162.6,325) 2235.82,325 2385.82,175 3500,175 3743.5,418.5 3843.5,418.5 3900,475 3900,765.15 3854.32,810.83 3854.32,3280.49 v1(3822.4,3312.4) 3614.95,3519.85 3614.95,4250 3899.2,4534.25 ; v1(2225,2375) 2175,2425 2175,2875 2200,2900 v1(2250,2900) ; 3900,4532.66 3900,6099.21
  Bottom Layer w59.06: v1(2725,2350) 3310,2935 C4.1@3460,2935 3560,3035 v1(3560,3275) ; v1(1850,1475) v1(2600,1475) v1(2600,2225) v1(1850,2225) v1(1850,1475)
VCC_LCD: C2.1 LCD1.2 R11.2 R12.2 RA1.5 RA1.6 RA1.7 RA1.8 RA2.5 RA2.6 RA2.7 RA2.8 VR1.CW | length 2204.9
  Top Layer w7.87: R11.2@300,6137.6 R12.2@400,6137.6 407.68,6145.28 VR1.CW@496.26,6145.28 539.72,6145.28 580,6105 580,6045 675,5950 837.4,5950 ; C2.1@837.4,6025 837.4,5871.6 LCD1.2@865,5844 934,5775 990,5775 1015,5800 1015,5890 1237,6112 RA2.8@1475,6112 RA1.5@2000,6112
VCCA: C43.1 C44.1 J4.1 R40.1 R41.1 R42.2 U13.8 | length 1790.6
  Top Layer w7.87: C43.1@375,662.4 378.35,659.06 U13.8@461.61,659.06 ; v1(425,659.06) 425,550 375,500 375,450 400,425 R41.1@437.6,425 ; R42.2@425,837.6 463.94,837.6 501.34,875 C44.1@540.95,875 ; v1(1019.29,525) 1025,530.71 J4.1@1025,672.05 1042.05,672.05 1120,750 1120,820 1087.6,852.4 R40.1@1087.6,900
  Top Layer w11.81: v1(425,659.06) R42.2@425,837.6
  Bottom Layer w11.81: v1(425,659.06) 559.06,525 v1(1019.29,525)
VGA_HSYN: D4.3 J3.13 U1.36 | length 5278.2
  Top Layer w7.87: J3.13@2755.32,6950 2837,6868.32 2837,6823.63 2890,6770.63 D4.3@2890,6593.31 2890,5590 2825,5525 2825,5125 2825,3925 3000,3750 3000,2550 3060,2490 3060,2255 3060,2145 2952.01,2037.01 U1.36@2811.61,2037.01
VGA_VSYN: D5.3 J3.14 U1.35 | length 5404.5
  Top Layer w7.87: U1.35@2811.61,2017.32 2957.32,2017.32 3080,2140 3080,2495 3025,2550 3025,3750 2850,3925 2850,5125 2850,5525 3065,5740 D5.3@3065,6593.31 3065,6730.47 J3.14@2845.47,6950
pads on no net: J2.9 J3.4 J3.9 J3.11 J3.12 J3.15 J4.MH1 J4.MH2 JP1.0 JP1.7 JP1.8 JP1.9 JP1.10 JP1.11 JP1.12 JP1.14 JP1.16 JP1.18 JP1.19 JP1.20 JP1.31 JP1.32 JP1.33 JP1.35 JP1.36 JP1.38 JP1.39 JP1.40 JP1.43 JP1.44 JP1.45 JP1.46 JP1.47 JP1.48 JP1.49 JP1.50 LCD1.M1 LCD1.M2 LCD1.M3 LCD1.M4 U1.3 U1.4 U1.5 U1.6 U1.7 U1.9 U1.10 U1.11 U1.15 U1.16 U1.17 U1.18 U1.20 U1.21 U1.22 U1.23 U1.24 U1.27 U1.29 U1.30 U1.31 U1.33 U1.77 U1.80 U1.122 U1.123 U1.129 U1.132 U1.133 U1.134 U1.135 U1.136 U1.138 U1.139 U1.140 U1.141 U1.151 U1.152 U1.154 U1.160 U1.161 U1.162 U1.167 U1.168 U1.169 U1.173 U1.174 U1.175 U1.178 U1.179 U1.180 U1.181 U1.185 U1.187 U1.188 U1.189 U1.191 U1.192 U1.193 U1.194 U1.204 U1.205 U1.206 U4.4 U5.4 U6.4 U10.2 U10.9 U10.12 U10.13 U10.14 U10.15 U10.16 U11.2 U11.9 U11.12 U11.13 U11.14 U11.15 U11.16 U12.5

## Polygon pours and split planes (outlines as drawn)
GND on Top Layer "Top Layer-GND" (solid, remove dead copper, pour order 1001): 73.11,7225 75,1065 1260,1065 1260,75 3973.11,75 3973.11,7225
AGND on Top Layer "Top Layer-AGND" (solid, remove dead copper, pour order 1000): 75,1035 75,75 1235,75 1235,1035
GND on Bottom Layer "Bottom Layer-GND" (solid, remove dead copper, pour order 1003): 75,7225 75,1060 1260,1060 1260,75 3975,75 3975,7225
AGND on Bottom Layer "Bottom Layer-AGND" (solid, remove dead copper, pour order 1002): 75,1035 75,75 1235,75 1235,1035
no net on Top Overlay (solid): 1050,4500 1000,4450 1100,4450
no net on Top Overlay (solid): 1700,4500 1650,4450 1750,4450
no net on Top Overlay (solid): 2350,4500 2300,4450 2400,4450
no net on Top Overlay (solid): 3000,4500 2950,4450 3050,4450

## Keep-outs
Keep-Out Layer:
  circle w10: c3830,4155 r160
  circle w10: c220,4155 r160
  circle w10: c220,7080 r160
  circle w10: c3830,7080 r160
  circle w10: c3830,220 r160
  circle w10: c220,220 r160
  lines w11.81: 50,50 50,7250 4000,7250 4000,50 50,50

## Silkscreen, mask and mechanical layers (free items; w line width, h text height)
Top Overlay:
  text "Weather Channel Station" at 3825,6075 h94.49 r270
  text "MENU" at 1250,3600 h120
Mechanical 1:
  the board outline again, w7.87
Drill Drawing:
  text ".LEGEND" at 150,-1400 h60
  text "Drill Drawing." at 150,-1500 h60

## Dimensions
0,7300 to 4050,7300 on Mechanical 1
0,7300 to 0,0 on Mechanical 1

## Text inside footprints (layer, text, board x,y; h text height)
HDR4: Top Overlay "10" at 1565,170 h50 r180; Top Overlay "9" at 1565,270 h50 r180; Top Overlay "1" at 2105,270 h50 r180; Top Overlay "2" at 2125,170 h50 r180
J2: Top Overlay "6" at 1116.73,7104.13 h31.5; Top Overlay "9" at 1443.9,7104.13 h31.5; Top Overlay "5" at 1498.43,6734.06 h31.5; Top Overlay "1" at 1072.05,6734.06 h31.5
J3: Top Overlay "1" at 2468.7,6730.32 h39.37; Top Overlay "15" at 2976.38,6953.54 h39.37; Top Overlay "5" at 3012.01,6730.32 h39.37; Top Overlay "11" at 2464.57,6949.61 h39.37
U4: Top Overlay "2" at 3605,3255 h31.5 r90; Top Overlay "3" at 3603.31,3355 h31.5 r90; Top Overlay "1" at 3603.31,3165.16 h31.5 r90
U5: Top Overlay "2" at 3630,2455 h31.5 r90; Top Overlay "3" at 3628.31,2555 h31.5 r90; Top Overlay "1" at 3628.31,2365.16 h31.5 r90
U6: Top Overlay "2" at 3630,1655 h31.5 r90; Top Overlay "3" at 3628.31,1755 h31.5 r90; Top Overlay "1" at 3628.31,1565.16 h31.5 r90